# Altium PCB RS232_M_V1.PcbDoc
Units mm, origin at the board's own origin, x right, y up, seen from the top; angles counter-clockwise.
Board outline 13.93 x 19 mm, 2 copper layers (Top Layer, Bottom Layer); 11 components, 18 nets, 60 pads, 5 vias.
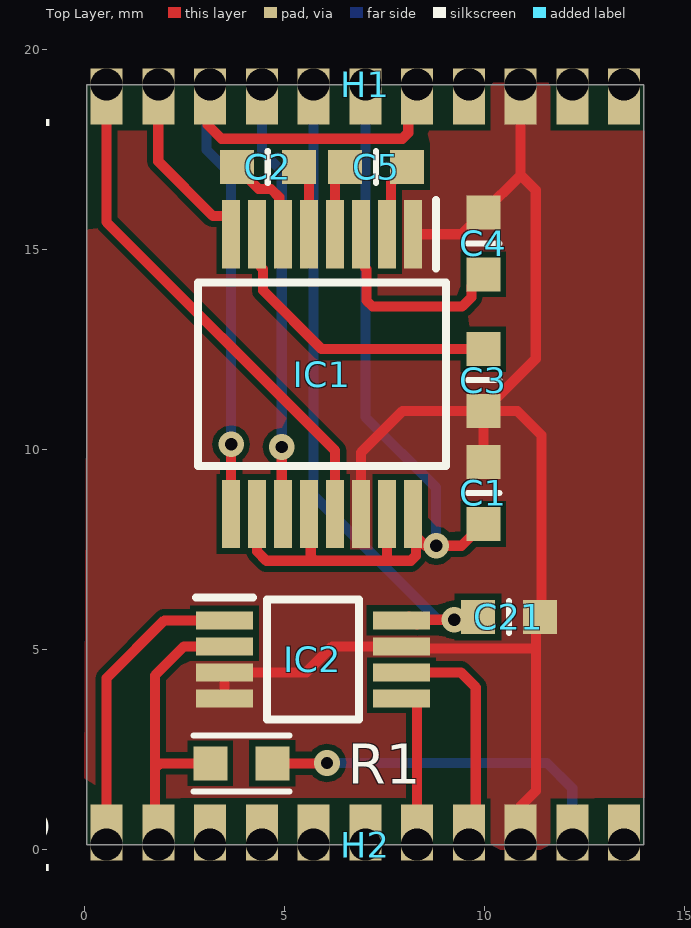
[diagram p0: Top Layer view]
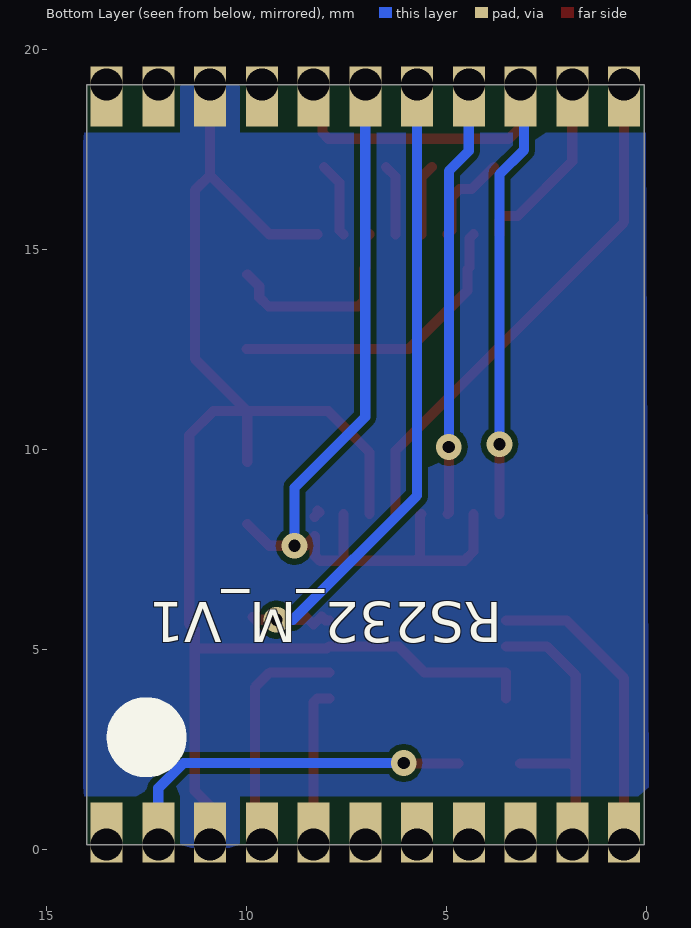
[diagram p1: Bottom Layer view, seen from below]
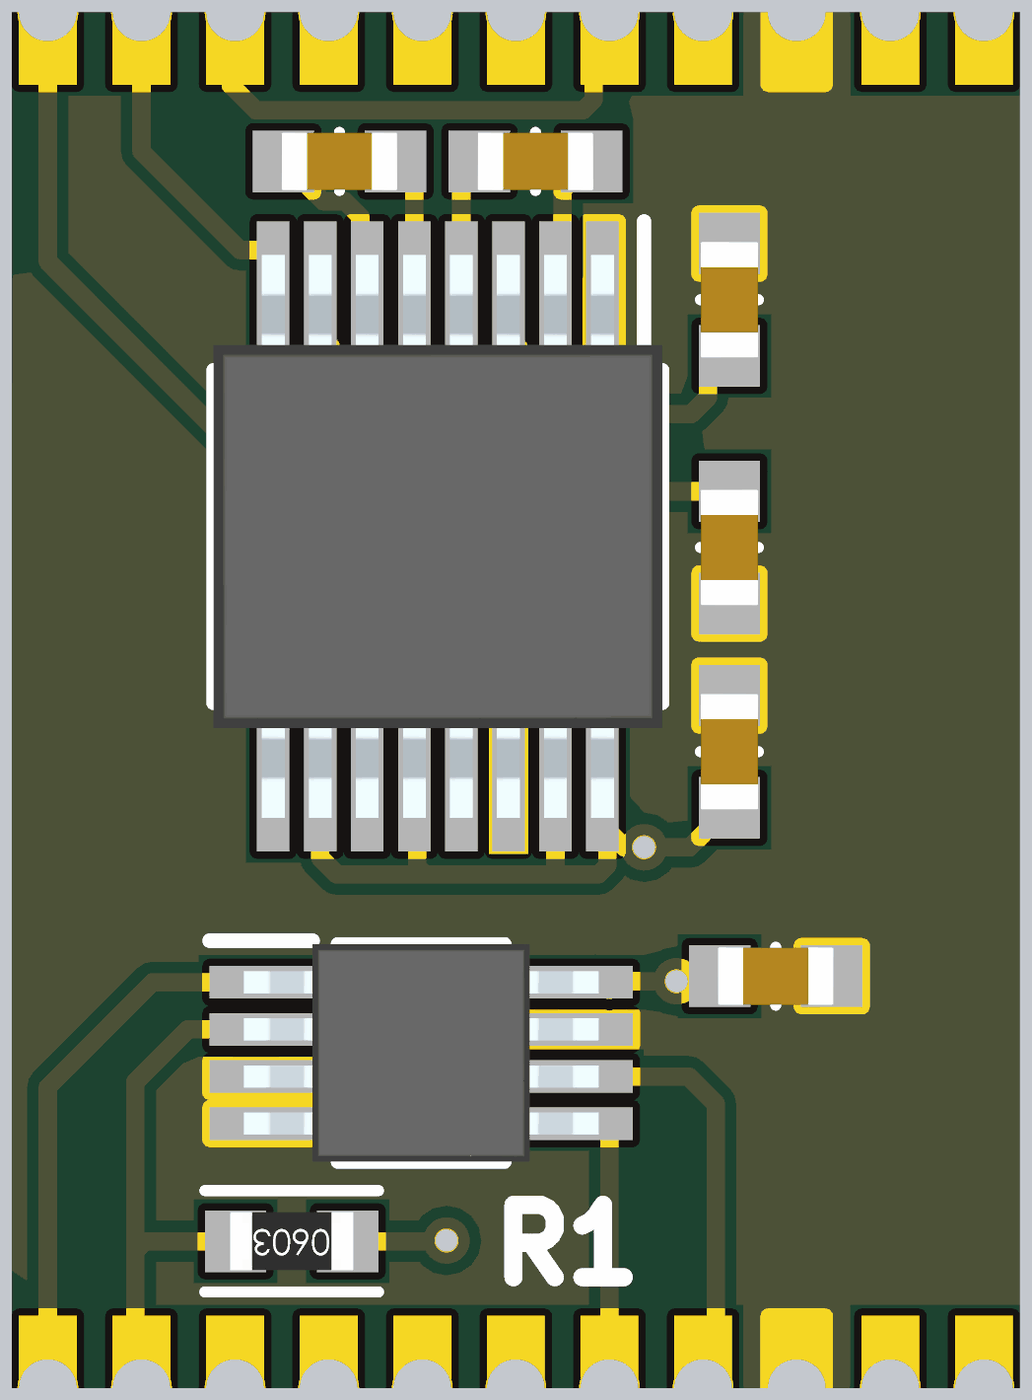
[diagram p2: 3D render of the assembled board from above, using the file's embedded part models]

## Layer stack, top to bottom
Top Solder: solder mask 0.0102, Solder Resist, Dk 3.5
Top Layer: signal copper 0.0356
Dielectric 1: dielectric 0.32, FR-4, Dk 4.8
Bottom Layer: signal copper 0.0356
Bottom Solder: solder mask 0.0102, Solder Resist, Dk 3.5

## Board outline
0.06,0.13 0.06,19.13 13.994,19.13 13.994,0.13

## Design rules (kind name [scope] priority, off if disabled: settings)
AssemblyTestPointUsage SilkToBoardRegionClearance_1 [All] p2:
AssemblyTestPointUsage SilkToBoardRegionClearance [All] p3:
Clearance [All] p1: gap=0.152 ignorepadtopadclearanceinfootprint=FALSE except(0: Arc-Hole Track-Hole SMDPad-Hole THPad-Hole Via-Hole Fill-Hole Poly-Hole Region-Hole Text-Hole)
HoleSize [All] p1: absolutevalues=TRUE maxlimit=6.35 minlimit=0.3 maxpercent=80.000 minpercent=20.000
MatchedLengths DiffPair_DIFF100MatchedLengths [InDifferentialPairClass('DIFF100')] p1: tolerance=0.152 checknetsindiffpair=TRUE checkdiffpairvsdiffpair=FALSE checkxsignals=FALSE checkothers=FALSE usedelayunits=FALSE
MinimumSolderMaskSliver [All] p1: minsoldermaskwidth=0.1
MinimumSolderMaskSliver SilkscreenOverComponentPads_2 [All] p2: minsoldermaskwidth=0.254
MinimumSolderMaskSliver SilkToSolderMaskClearance_1 [IsPad] p3: minsoldermaskwidth=0.254
MinimumSolderMaskSliver SilkscreenOverComponentPads_1 [All] p4: minsoldermaskwidth=0.254
MinimumSolderMaskSliver SilkToSolderMaskClearance [IsPad] p5: minsoldermaskwidth=0.254
MinimumSolderMaskSliver SilkscreenOverComponentPads [All] p6: minsoldermaskwidth=0.254
PolygonConnect [All] p1: connectstyle=Direct reliefconductorwidth=0.254 reliefentries=4 polygonreliefangle="90 Angle" airgapwidth=0.254
RoomDefinition RS232_M_V1 [InComponentClass('RS232_M_V1')] p1: confinementstyle=ConfineIn formatcopy=TRUE lockcomponents=FALSE outline -0.24,-0.43 14.3,-0.43 14.3,19.74 -0.24,19.74
RoutingVias [All] p1: holewidth=0.305 width=0.635 viastyle="Through Hole" minholewidth=0.305 minwidth=0.635 maxholewidth=0.711 maxwidth=1.27
SilkToBoardRegionClearance SilkToBoardRegionClearance_2 [All] p1:
SilkToSolderMaskClearance SilkToSolderMaskClearance_2 [IsPad] p1: minsilkscreentomaskgap=0.254 clearancetoexposedcopper=TRUE
SolderMaskExpansion [All] p1: expansion=0.102
Width [All] p1: maxlimit=2.54 minlimit=0.152 preferedwidth=0.254
26 further rules are at their usual default settings.

## Components (designator, comment, footprint, x,y, rotation, side; value= is the part's Value field where it differs from the comment)
C1 "0.10µF" SMD-0603C 9.98,8.92 r180 top
C2 "0.10µF" SMD-0603C 4.59,17.07 r270 top
C3 "0.10µF" SMD-0603C 9.98,11.74 r0 top
C4 "0.10µF" SMD-0603C 9.98,15.16 r180 top
C5 "0.10µF" SMD-0603C 7.3,17.07 r270 top
C21 "0.10µF" SMD-0603C 10.62,5.82 r90 top
H1 "CASTELLATED 11 pin" "CASTELLATED 11 pin" 13.498,19.13 r180 top locked
H2 "CASTELLATED 11 pin" "CASTELLATED 11 pin" 0.56,0.13 r0 top locked
IC1 "MAX3221ECAE+" SOP65P778X199-16N 5.95,11.89 r270 top
IC2 "MAX11612EUA+" SOP65P490X110-8N 5.72,4.76 r0 top
R1 "33" SMD-0603-RES 3.93,2.16 r90 top

## Footprints (in the part's own frame and the unit in brackets; to place one, negate y for a bottom-side part, rotate by r counter-clockwise, add the part's x,y. Pads: shape width x height; smd on the part's side, far side on the other; paste and mask are expansions set on the pad)
"CASTELLATED 11 pin" [mm]
  rect 0.8x1.4 / inner rect 0.8x1.5 / far side rect 0.8x1.5 hole 0.8 copper offset 0,0.3: 1(0,0) 2(1.294,0) 3(2.587,0) 4(3.881,0) 5(5.175,0) 6(6.469,0) 7(7.762,0) 8(9.056,0) 9(10.35,0) 10(11.644,0) 11(12.938,0)
SMD-0603-RES [mm]
  rect 0.85x0.85 smd: 1(0,0.775) 2(0,-0.775)
  silkscreen extent -0.7,-1.2 0.7,1.2, body extent -0.4,-0.85 0.4,0.85, height 0.56
SMD-0603C [mm]
  rect 0.85x0.85 smd: 1(0,0.775) 2(0,-0.775)
  silkscreen extent -0.4,0 0.4,0, body extent -0.4,-0.8 0.4,0.8, height 0.9
SOP65P490X110-8N [mm]
  rect 1.425x0.45 smd: 1(-2.212,0.975) 2(-2.212,0.325) 3(-2.212,-0.325) 4(-2.212,-0.975) 5(2.212,-0.975) 6(2.212,-0.325) 7(2.212,0.325) 8(2.212,0.975)
  silkscreen extent -2.93,-1.5 1.15,1.55, body extent -2.45,-1.5 2.45,1.5, height 1.1
SOP65P778X199-16N [mm]
  rect 1.705x0.45 smd: 1(-3.498,2.275) 2(-3.498,1.625) 3(-3.498,0.975) 4(-3.498,0.325) 5(-3.498,-0.325) 6(-3.498,-0.975) 7(-3.498,-1.625) 8(-3.498,-2.275) 9(3.498,-2.275) 10(3.498,-1.625) 11(3.498,-0.975) 12(3.498,-0.325) 13(3.498,0.325) 14(3.498,0.975) 15(3.498,1.625) 16(3.498,2.275)
  silkscreen extent -4.35,-3.1 2.29,3.1, body extent -3.89,-3.1 3.89,3.1, height 1.99

## Part data
C1 C2 C3 C4 C5 C21: library part GCJ188R72A104KA01D, "CAP CER 0.1UF 100V X7R 0603", Digi-Key Part Number=490-13420-1-ND, Manufacturer="Murata Electronics North America", Operating Temperature="-55°C ~ 125°C", Package / Case="0603 (1608 Metric)", Ratings=AEC-Q200, Supplier Part Number 1=81-GCJ188R72A104KA1D, Temperature Coefficient=X7R, Tolerance=±10%, Voltage=100V, @ qty=0, Applications="Automotive, Boardflex Sensitive", Datasheets=http://www.murata.com/~/media/webrenewal/support/library/catalog/products/capacitor/mlcc/c03e.ashx, Factory Stock=0, Features="Soft Termination", Height - Seated (Max)=-, Image=//media.digikey.com/Renders/Murata%20Renders/0603%28LQG18%29.jpg, Lead Spacing=-, Lead Style=-, Minimum Quantity=1, Mounting Type="Surface Mount, MLCC", Packaging="Cut Tape (CT)", Part Number=GCJ188R72A104KA01D, Part Status=Active, Quantity Available=2728, Series=GCJ, Size / Dimension="0.063\" L x 0.031\" W (1.60mm x 0.80mm)", Supplier 1=Mouser, Thickness (Max)="0.035\" (0.90mm)", Unit Price (USD)=0,23
IC1: "Integrated Circuit", Manufacturer_Name="Maxim Integrated", Supplier Part Number 1=700-MAX3221ECAE, Datasheet Link=http://datasheets.maximintegrated.com/en/ds/MAX3221E-MAX3243E.pdf, Height=1.99mm, Manufacturer_Part_Number=MAX3221ECAE+, Supplier 1=Mouser
IC2: "Integrated Circuit", Supplier Part Number 1=700-MAX11612EUA, Supplier 1=Mouser
R1: library part ERJ-3EKF33R0V, "RES SMD 33 OHM 1% 1/10W 0603", Digi-Key Part Number=P33.0HCT-ND, Manufacturer="Panasonic Electronic Components", Operating Temperature="-55°C ~ 155°C", Package / Case="0603 (1608 Metric)", Power (Watts)="0.1W, 1/10W", Supplier Device Package=0603, Supplier Part Number 1=667-ERJ-3EKF33R0V, Temperature Coefficient=±100ppm/°C, Tolerance=±1%, @ qty=1500, Composition="Thick Film", Datasheets=http://industrial.panasonic.com/www-cgi/jvcr13pz.cgi?E+PZ+3+AOA0002+ERJ3EKF33R0V+7+WW, Factory Stock=0, Failure Rate=-, Features="Automotive AEC-Q200", Height - Seated (Max)="0.022\" (0.55mm)", Image=//media.digikey.com/Photos/Panasonic%20Photos/MFG_ERJ-P6W%20Series.jpg, Minimum Quantity=1, Number of Terminations=2, Packaging="Cut Tape (CT)", Part Number=ERJ-3EKF33R0V, Part Status=Active, Quantity Available=1306721, Series=ERJ, Size / Dimension="0.063\" L x 0.031\" W (1.60mm x 0.80mm)", Supplier 1=Mouser, Unit Price (USD)=0.00379

## Via types
v1: diameter 0.64, hole 0.31, Top Layer to Bottom Layer, tented both sides, 5 vias

## Nets (pads, with @x,y where several pads share a name; then routed paths per layer and width w, separated by ;. In a path a pad name is that pad's centre, name@x,y a point inside that pad or via, vN(x,y) a via of type N, cw(c..) or ccw(c..) an arc to the next point about the centre after c; other vN are vias at no path point)
ADC0: H2.1 IC2.1 | length 7.7
  Top Layer w0.254: H2.1 0.56,4.29 2.005,5.735 IC2.1
ADC1: H2.2 IC2.2 R1.1 | length 7.7
  Top Layer w0.254: H2.2 1.77,0.214 1.77,2.03 ; R1.1 1.9,2.16 1.77,2.03 ; IC2.2 2.495,5.085 1.77,4.36 1.77,2.03
B1: H2.7 IC2.5 | length 4
  Top Layer w0.254: IC2.5 8.224,3.785 8.322,3.687 H2.7
B2: H2.8 IC2.6 | length 6
  Top Layer w0.254: IC2.6 9.415,4.435 9.79,4.06 9.79,0.304 H2.8
D1: H1.8 IC1.11 | length 11
  Top Layer w0.254: v1(4.94,10.07) 4.94,8.427 IC1.11
  Bottom Layer w0.254: H1.8 4.442,17.468 4.94,16.97 v1(4.94,10.07)
D2: H1.5 H1.9 IC1.9 | length 18.6
  Top Layer w0.254: H1.9 3.09,19.072 3.09,18.12 3.436,17.774 7.954,17.774 8.101,17.921 8.101,18.908 H1.5 ; v1@3.65,10.16 v1(3.675,10.135) IC1.9
  Bottom Layer w0.254: H1.9 3.06,19.042 3.06,17.5 3.675,16.885 v1(3.675,10.135)
D5: H2.10 R1.2 | length 9.2
  Top Layer w0.254: R1.2 6.06,2.16 v1(6.07,2.17)
  Bottom Layer w0.254: v1(6.07,2.17) 11.57,2.17 12.204,1.536 H2.10
GND: C1.2 C3.2 C4.2 C21.2 H1.3 H2.9 IC1.1 IC1.14 IC2.3 IC2.4 IC2.7 | length 39.3
  Top Layer w0.254: IC2.4 IC2.3 5.555,4.435 6.205,5.085 IC2.7 7.986,5.031 11.295,5.031 ; IC1.14 6.925,9.935 7.955,10.965 C3.2 ; IC1.1 9.433,15.388 C4.2 10.911,16.866 ; C1.2 C3.2 ; H2.9 10.91,1.09 11.295,1.475 11.295,5.031 ; H1.3 10.911,16.866 ; C3.2 10.835,10.965 11.43,10.37 11.43,5.64 11.295,5.505 11.295,5.031 ; C3.2 11.29,12.275 11.29,16.486 10.911,16.866
IO1: H1.11 IC1.13 | length 13.1
  Top Layer w0.254: H1.11 0.56,15.69 6.275,9.975 IC1.13
IO2: H1.10 IC1.8 | length 4.7
  Top Layer w0.254: H1.10 1.854,17.209 3.218,15.845 3.577,15.845 3.675,15.747 IC1.8
NetC2_1: C2.1 IC1.5 | length 1.8
  Top Layer w0.254: C2.1 5.625,16.81 IC1.5
NetC2_2: C2.2 IC1.6 | length 2.3
  Top Layer w0.254: C2.2 4.365,16.52 4.67,16.52 4.877,16.313 4.877,15.486 IC1.6
NetC3_1: C3.1 IC1.7 | length 7.6
  Top Layer w0.254: IC1.7 4.423,15.29 4.423,14.561 4.471,14.514 4.471,13.985 5.941,12.515 C3.1@10,12.515
NetC4_1: C4.1 IC1.3 | length 5.2
  Top Layer w0.254: IC1.3 7.023,15.29 7.023,14.551 7.06,14.514 7.06,13.729 7.209,13.58 9.45,13.58 9.682,13.812 9.682,14.087 C4.1
NetC5_1: C5.1 IC1.2 | length 1.9
  Top Layer w0.254: IC1.2 7.673,15.486 7.673,16.678 C5.1@8.065,17.07
NetC5_2: C5.2 IC1.4 | length 1.8
  Top Layer w0.254: IC1.4 6.275,16.83 C5.2@6.515,17.07
VCC2: C1.1 H1.6 IC1.10 IC1.12 IC1.15 IC1.16 | length 22.5
  Top Layer w0.254: IC1.10 4.325,7.455 4.555,7.225 5.765,7.225 ; IC1.12 5.666,8.351 5.666,7.324 5.765,7.225 ; IC1.15 7.575,7.225 ; IC1.16@8.292,8.325 IC1.16 ; C1.1 9.435,7.6 v1(8.8,7.6) 8.53,7.6 8.292,7.838 8.292,7.351 8.166,7.225 7.575,7.225 ; 5.765,7.225 7.575,7.225 ; IC1.16 8.225,8.482 8.18,8.437 IC1.16
  Bottom Layer w0.254: H1.6 7.03,10.82 8.8,9.05 v1(8.8,7.6)
VCC3: C21.1 H1.7 IC2.8 | length 17.3
  Top Layer w0.254: IC2.8 8.022,5.735 8.12,5.833 8.323,5.63 8.513,5.82 8.583,5.75 v1(9.25,5.75) 9.775,5.75 C21.1
  Bottom Layer w0.254: H1.7 5.736,8.854 8.84,5.75 v1(9.25,5.75)
pads on no net: H1.1 H1.2 H1.4 H2.3 H2.4 H2.5 H2.6 H2.11

## Polygon pours and split planes (outlines as drawn)
GND on Bottom Layer "GND_L02_P006" (solid, pour order 6): 0.02,19.14 14,19.14 14.08,19.06 14.08,0.05 0.07,0.05 -0.06,-0.08
no net on Bottom Layer "NONET_L02_P000" (solid, pour order 0): 0.314,18.291
GND on Top Layer "GND_L01_P004" (solid, pour order 4): 0.09,19.18 14.02,19.18 14.02,0.13 14.06,0.09 13.97,0 0,0

## Silkscreen, mask and mechanical layers (free items; w line width, h text height)
Bottom Overlay:
  circle w1: c12.499,2.813 r0.5
  text "RS232_M_V1" at 3.604,6.189 h1 r180
Mechanical 1:
  pour cut-out: 5.399,12.138
  lines w0.2: 13.994,0.13 13.994,19.13 ; 13.994,0.13 0.06,0.13 0.06,19.13 13.994,19.13